# EAGLE board pcb-2d (EAGLE 9.7.0)
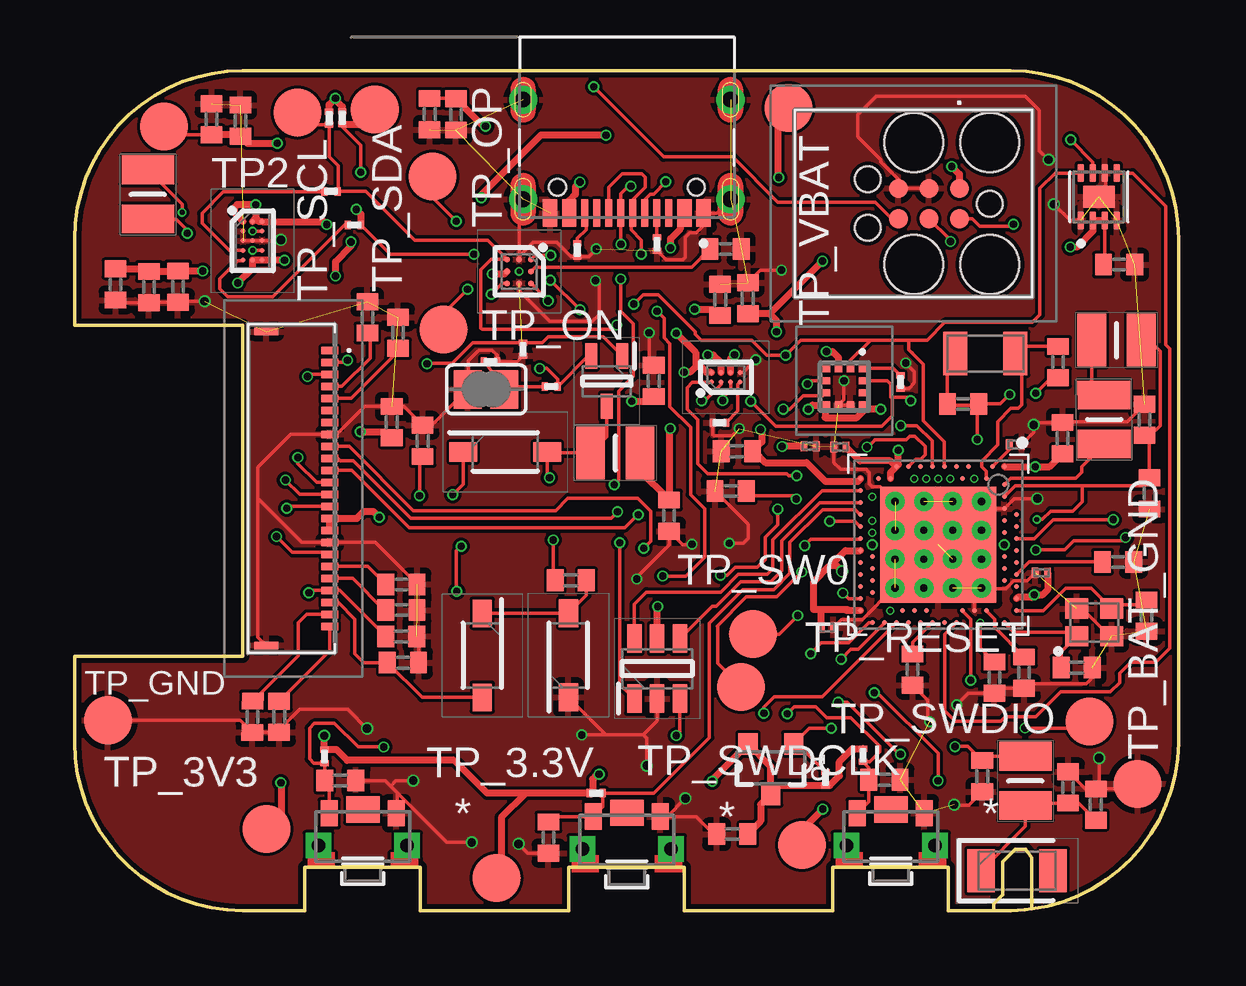
[diagram p0: board, top side]
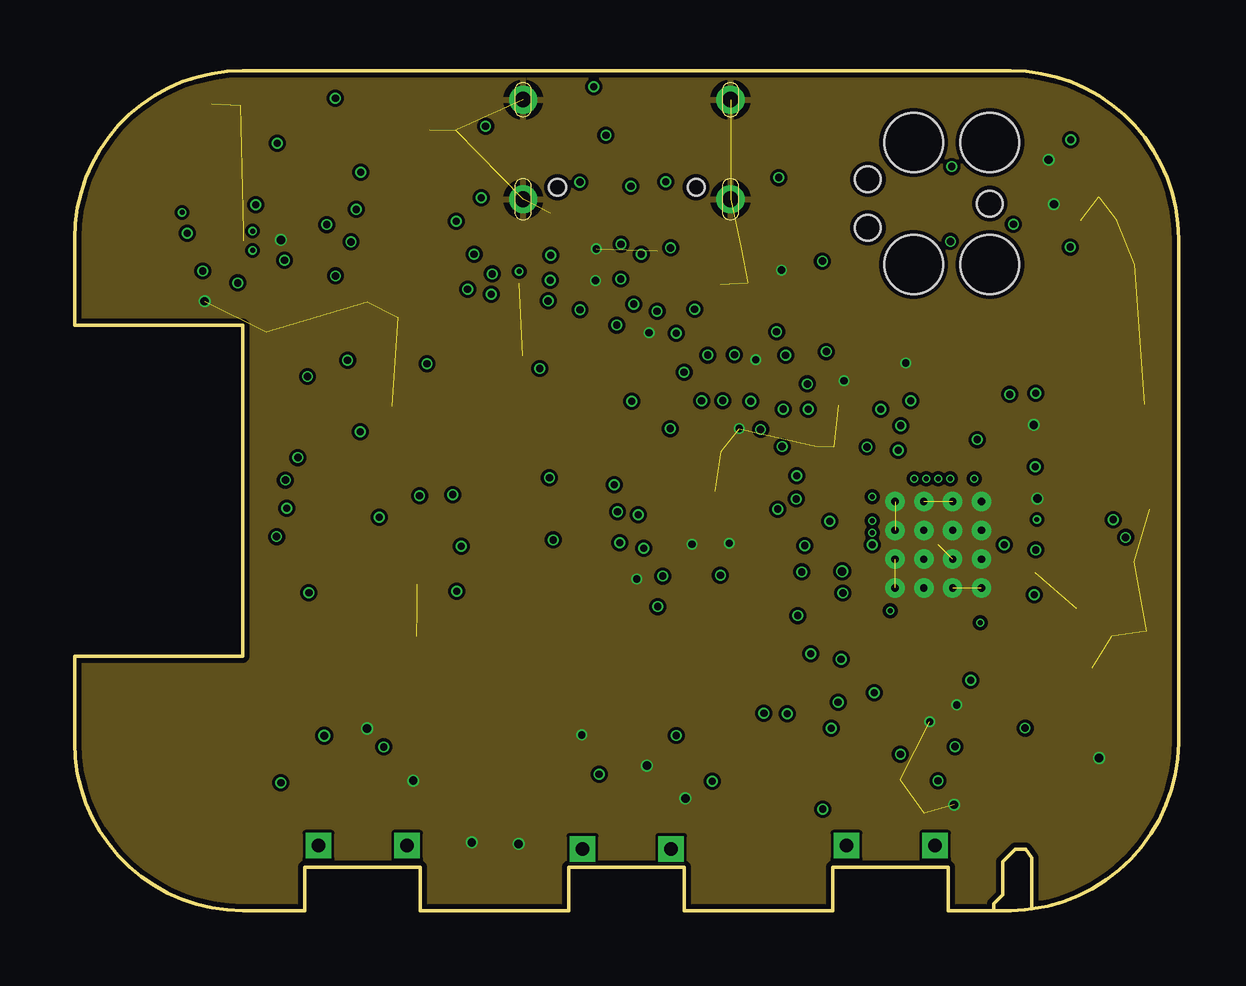
[diagram p1: board, inner layer Route2]
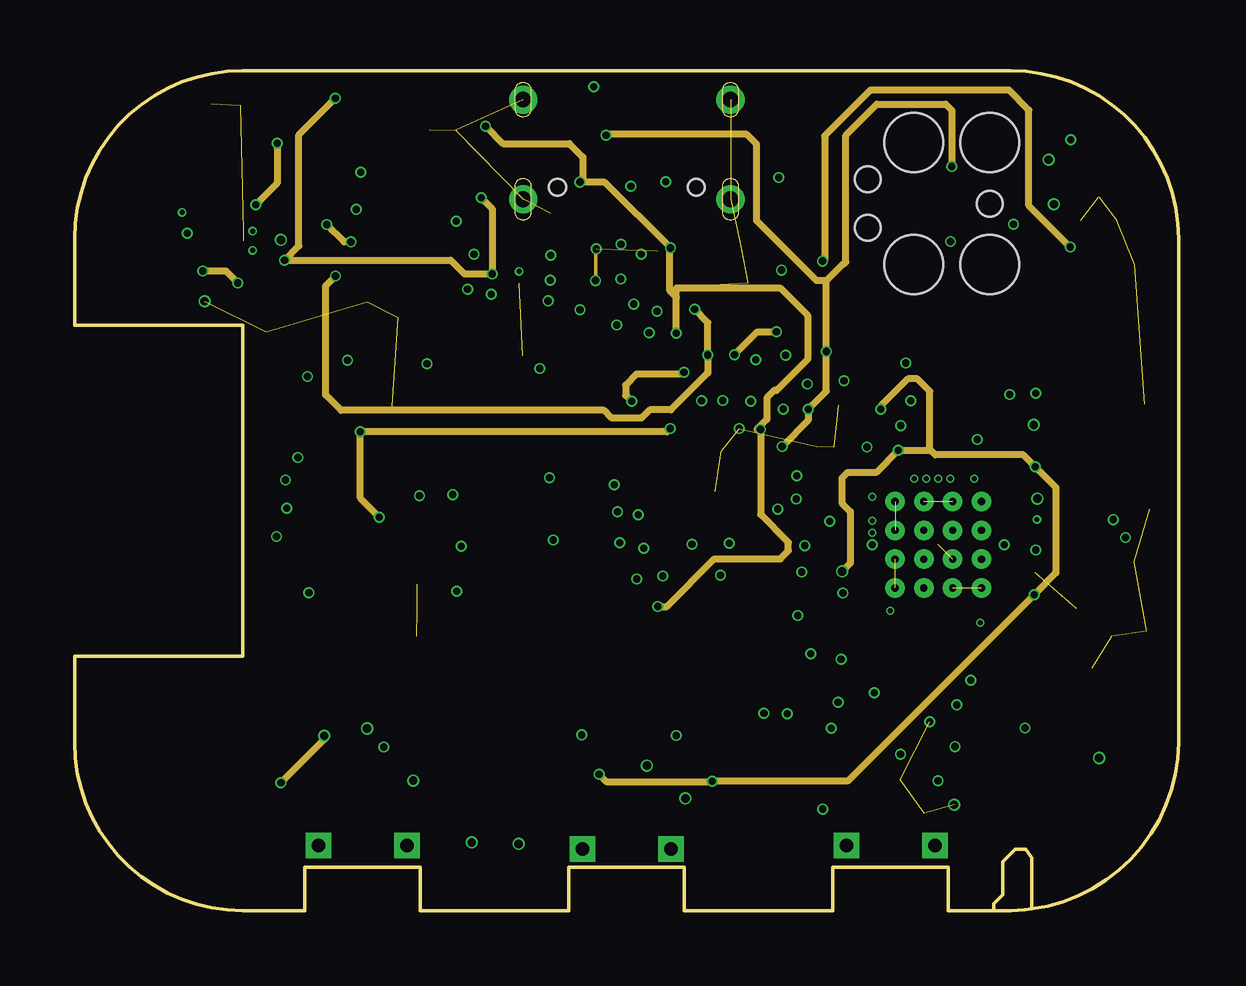
[diagram p2: board, inner layer Route15]
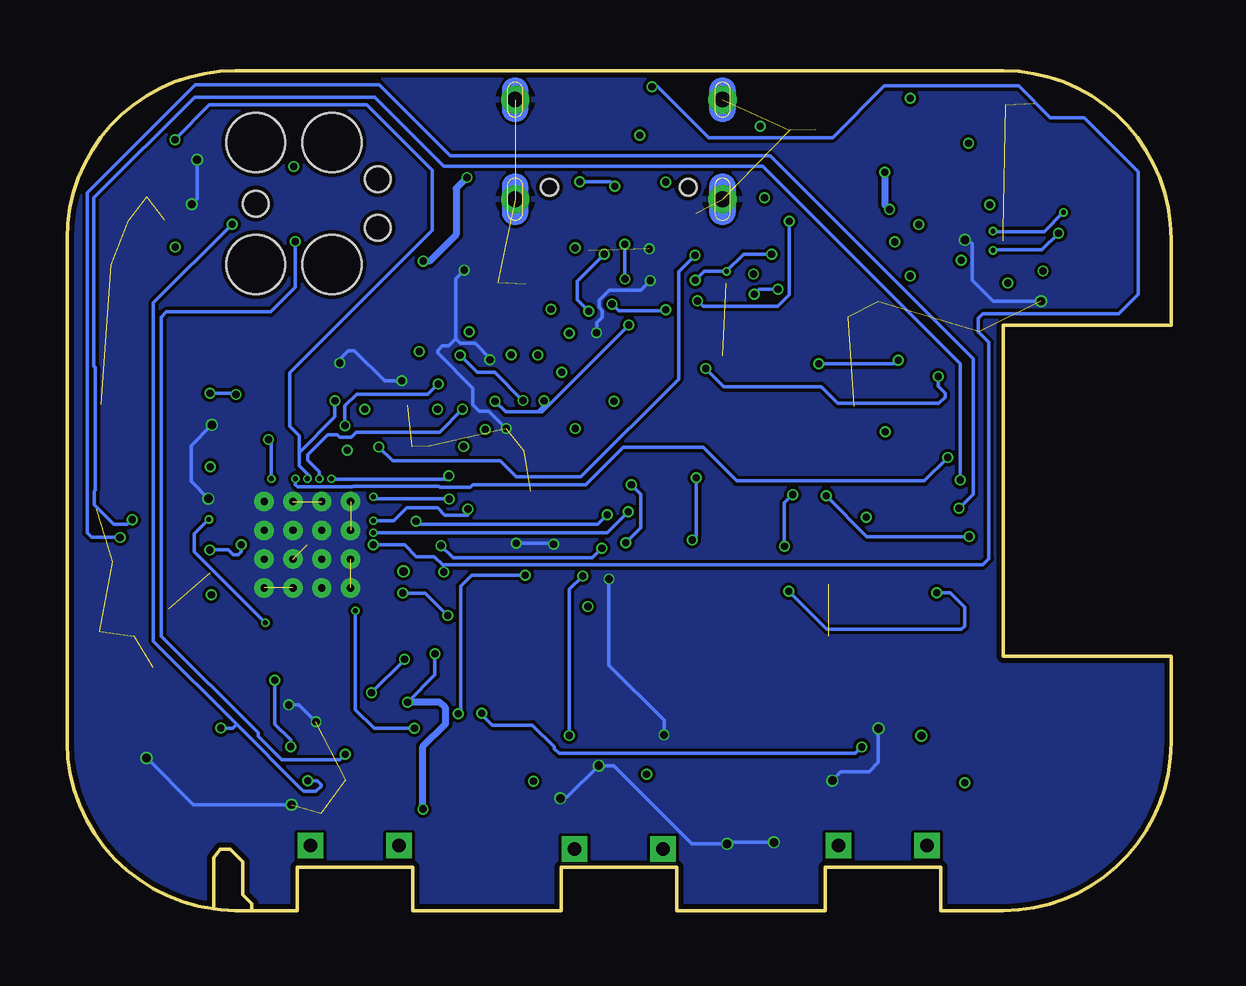
[diagram p3: board, bottom side, seen from below]

Size 46 x 35 mm. Coordinates in mm from the lower left corner, seen from the top.
Outline: 38.3,0 39,0 arc8 39.88,0.07
Outline: 38.3,0 36.4,0 36.4,1.8 31.6,1.8 31.6,0 25.4,0 25.4,1.8 20.6,1.8 20.6,0 14.4,0 14.4,1.8 9.6,1.8 9.6,0 7,0 arc-90 0,7 0,10.6 7,10.6 7,24.4 0,24.4 0,28 arc-90 7,35 39,35 arc-90 46,28 46,7 arc-82 39.88,0.07
Outline: 38.3,0 38.3,0.29 38.67,0.67 38.67,2.04 39.2,2.56 39.63,2.56 39.88,2.2 39.88,0.07
Copper layers (1+2*15+16): Top 0.035mm / dielectric 1.6mm / Route2 0.035mm / dielectric 0.15mm / Route15 0.035mm / dielectric 0.2mm / Bottom 0.035mm
Design rules "jlcpcb-2layers.dru *": minimum track width 5mil, minimum drill 0.3mm, track to track 5mil, track to pad 5mil, pad to pad 5mil, via to via 5mil, smd to smd 5mil, copper to edge 0.2mm, drill to drill 6mil, minimum pad ring 10mil, minimum via ring 3mil, stop-mask expansion 4mil, vias tented up to drill 0mil, thermal gap 10mil

## Footprints (pad centres in the part's own frame; a part is rotated, then mirrored left to right if it is on the bottom)
2450AT18B100E_ANTC3216X140N = smd 1.15 x 1.8: 1 -1.5,0; 2 1.5,0
ESP32_C6_LIBRARY_1_ESP32_WROVER_EAGLE-LTSPICE_C0402 = smd 0.7 x 0.9: 1 -0.65,0; 2 0.65,0
NORDIC_NRF_3_RESC0201_L = smd 0.28 x 0.43: 1 -0.255,0; 2 0.255,0
ESP32_C6_LIBRARY_3_SOT95P280X145-6N = smd 1.2 x 0.6: 1 -1.25,0.95; 2 -1.25,0; 3 -1.25,-0.95; 4 1.25,-0.95; 5 1.25,0; 6 1.25,0.95
ESP32_C6_LIBRARY_5_SOD3716X135N = smd 1.15 x 0.8: 1 -1.75,0; 2 1.75,0
BQ25180YBGR_BGA8C40P2X4_100X155X50 = smd 0.2 x 0.2: A1 -0.2,0.6; A2 0.2,0.6; B1 -0.2,0.2; B2 0.2,0.2; C1 -0.2,-0.2; C2 0.2,-0.2; D1 -0.2,-0.6; D2 0.2,-0.6
RT6160AWSC_BGA15C40P3X5_140X230X60 = smd 0.216 x 0.216: A1 -0.4,0.8; A2 0,0.8; A3 0.4,0.8; B1 -0.4,0.4; B2 0,0.4; B3 0.4,0.4; C1 -0.4,0; C2 0,0; C3 0.4,0; D1 -0.4,-0.4; D2 0,-0.4; D3 0.4,-0.4; E1 -0.4,-0.8; E2 0,-0.8; E3 0.4,-0.8
BMA423_BMA423 = smd 0.3 x 0.35: 1 -0.75,-0.775; 2 -0.25,-0.775; 3 0.25,-0.775; 4 0.75,-0.775; 7 0.75,0.775; 8 0.25,0.775; 9 -0.25,0.775; 10 -0.75,0.775 | smd 0.35 x 0.3: 5 0.775,-0.25; 6 0.775,0.25; 11 -0.775,0.25; 12 -0.775,-0.25
DRV2605YZFR_BGA9C50P3X3_144X144X62 = smd 0.25 x 0.25: A1 -0.5,0.5; A2 0,0.5; A3 0.5,0.5; B1 -0.5,0; B2 0,0; B3 0.5,0; C1 -0.5,-0.5; C2 0,-0.5; C3 0.5,-0.5
TC2030-IDC_TC2030IDC = smd 0.783 x 0.783: 1 -0.953,-0.635; 2 -0.953,0.635; 3 0.317,-0.635; 4 0.317,0.635; 5 1.588,-0.635; 6 1.588,0.635 | hole 2.451: -2.223,-2.54; -2.223,2.54; 0.952,-2.54; 0.952,2.54 | hole 1.067: -2.223,0; 2.857,-1.016; 2.857,1.016
503480-2400_5034802400 = smd 0.3 x 0.7: 1 -5.75,1.525; 2 -5.25,1.525; 3 -4.75,1.525; 4 -4.25,1.525; 5 -3.75,1.525; 6 -3.25,1.525; 7 -2.75,1.525; 8 -2.25,1.525; 9 -1.75,1.525; 10 -1.25,1.525; 11 -0.75,1.525; 12 -0.25,1.525; 13 0.25,1.525; 14 0.75,1.525; 15 1.25,1.525; 16 1.75,1.525; 17 2.25,1.525; 18 2.75,1.525; 19 3.25,1.525; 20 3.75,1.525; 21 4.25,1.525; 22 4.75,1.525; 23 5.25,1.525; 24 5.75,1.525 | smd 0.3 x 1: MP1 -6.54,-1.125; MP2 6.54,-1.125
KH-TYPE-C-16P_KINGHELM_KH-TYPE-C-16P = smd 0.6 x 1.15: A1_B12 -3.2,4.725; A4_B9 -2.4,4.725; A9_B4 2.4,4.725; A12_B1 3.2,4.725 | smd 0.3 x 1.15: A5 -1.25,4.725; A6 -0.25,4.725; A7 0.25,4.725; A8 1.25,4.725; B5 1.75,4.725; B6 0.75,4.725; B7 -0.75,4.725; B8 -1.75,4.725 | drill 0.65 pad 1.05: SH1 -4.32,0; SH2 4.32,0; SH3 -4.32,4.15; SH4 4.32,4.15 | hole 0.7: -2.89,3.65; 2.89,3.65
MLP2016SR47MT0S1_INDC2016X100N = smd 1.2 x 2.2: 1 -1.028,0; 2 1.028,0
ESP32_C6_LIBRARY_4_ESP32_C6_LIBRARY_4_ESP32_C6_LIBRARY_4_ESP32_C6_LIBRARY_4_ESP32_WROVER_SPARKFUN-DISCRETESEMI_SOT23-3 = smd 0.8 x 0.9: 1 -0.95,-1; 2 0.95,-1; 3 0,1.1
ESP32_C6_LIBRARY_6_SOT65P210X110-3N = smd 1.05 x 0.5: 1 -1.05,0.65; 2 -1.05,-0.65; 3 1.05,0
ERA-1AEB3401C_0201 = smd 0.35 x 0.25: 1 0,0.275; 2 0,-0.275
CPF0201D7K68C1_0201 = smd 0.35 x 0.25: 1 0,0.275; 2 0,-0.275
ESP32_C6_LIBRARY_7_JUMPER_SJ = smd 1.168 x 1.6: 1 -0.762,0; 2 0.762,0
2025-10-22_07-23-44_LIBRARY_SW_EVP-AKE31A_PAN = smd 0.711 x 1.092: 1 -1.4,-0.972; 2 1.4,-0.972 | drill 0.559 pad 0.914 square: 3 -1.848,0.381; 4 1.848,0.381 | smd 1.397 x 1.092: 5 0,-1.124
HECTOR_WATCH_1_TP20R = smd 2 x 2: TP 0,0
ESP32_C6_LIBRARY_SON50P200X200X80-9N = smd 0.76 x 0.27: 1 -0.985,0.75; 2 -0.985,0.25; 3 -0.985,-0.25; 4 -0.985,-0.75; 5 0.985,-0.75; 6 0.985,-0.25; 7 0.985,0.25; 8 0.985,0.75 | smd 0.9 x 1.3: 9 0,0
NORDIC_NRF_4_AQFN50P700X700X85_HS-74N = smd 4.85 x 4.85: P$74 0,0 | drill 0.3 pad 0.6: P$75 -1.8,1.8; P$76 -0.6,1.8; P$77 0.6,1.8; P$78 1.8,1.8; P$79 -1.8,0.6; P$80 -0.6,0.6; P$81 0.6,0.6; P$82 1.8,0.6; P$83 -1.8,-0.6; P$84 -0.6,-0.6; P$85 0.6,-0.6; P$86 1.8,-0.6; P$87 -1.8,-1.8; P$88 -0.6,-1.8; P$89 0.6,-1.8; P$90 1.8,-1.8 | smd 0.2 x 0.2: P$A8 -1.25,3.25; P$A10 -0.75,3.25; P$A12 -0.25,3.25; P$A14 0.25,3.25; P$A16 0.75,3.25; P$A18 1.25,3.25; P$A20 1.75,3.25; P$A22 2.25,3.25; P$A23 2.75,3.25; P$AA24 3.25,-2.25; P$AB2 -2.75,-2.5; P$AC5 -2,-2.75; P$AC9 -1,-2.75; P$AC11 -0.5,-2.75; P$AC13 0,-2.75; P$AC15 0.5,-2.75; P$AC17 1,-2.75; P$AC19 1.5,-2.75; P$AC21 2,-2.75; P$AC24 3.25,-2.75; P$AD2 -2.75,-3.25; P$AD4 -2.25,-3.25; P$AD6 -1.75,-3.25; P$AD8 -1.25,-3.25; P$AD10 -0.75,-3.25; P$AD12 -0.25,-3.25; P$AD14 0.25,-3.25; P$AD16 0.75,-3.25; P$AD18 1.25,-3.25; P$AD20 1.75,-3.25; P$AD22 2.25,-3.25; P$AD23 2.75,-3.25; P$B1 -3.25,2.75; P$B3 -2.5,2.75; P$B5 -2,2.75; P$B7 -1.5,2.75; P$B9 -1,2.75; P$B11 -0.5,2.75; P$B13 0,2.75; P$B15 0.5,2.75; P$B17 1,2.75; P$B19 1.5,2.75; P$B24 3.25,2.75; P$C1 -3.25,2.25; P$D2 -2.75,2; P$D23 2.75,2; P$E24 3.25,1.75; P$F2 -2.75,1.5; P$F23 2.75,1.5; P$G1 -3.25,1.25; P$H2 -2.75,1; P$H23 2.75,1; P$J1 -3.25,0.75; P$J24 3.25,0.75; P$K2 -2.75,0.5; P$L1 -3.25,0.25; P$L24 3.25,0.25; P$M2 -2.75,0; P$N1 -3.25,-0.25; P$N24 3.25,-0.25; P$P2 -2.75,-0.5; P$P23 2.75,-0.5; P$R1 -3.25,-0.75; P$R24 3.25,-0.75; P$T2 -2.75,-1; P$T23 2.75,-1; P$U1 -3.25,-1.25; P$U24 3.25,-1.25; P$V23 2.75,-1.5; P$W1 -3.25,-1.75; P$W24 3.25,-1.75; P$Y2 -2.75,-2; P$Y23 2.75,-2
NORDIC_NRF_BT-XTAL_2016_N = smd 0.95 x 0.85: 1 -0.725,-0.575; 2 0.725,-0.575; 3 0.725,0.575; 4 -0.725,0.575
NORDIC_NRF_1_XTAL_3215_N = smd 1 x 1.8: 1 -1.25,0; 2 1.25,0

## Placement (x,y rotation side)
ANT1  2450AT18B100E_2450AT18B100E  [2450AT18B100E_ANTC3216X140N]  39.27,1.66 0 top
C1  12pF  [ESP32_C6_LIBRARY_1_ESP32_WROVER_EAGLE-LTSPICE_C0402]  41.76,10.13 0 top
C1-EP-DR  10uF  [ESP32_C6_LIBRARY_1_ESP32_WROVER_EAGLE-LTSPICE_C0402]  24.77,16.46 270 top
C2  12pF  [ESP32_C6_LIBRARY_1_ESP32_WROVER_EAGLE-LTSPICE_C0402]  44.66,12.29 270 top
C2-EP-DR  4.7uF/25V  [ESP32_C6_LIBRARY_1_ESP32_WROVER_EAGLE-LTSPICE_C0402]  20.67,13.77 180 top
C3  1pF  [ESP32_C6_LIBRARY_1_ESP32_WROVER_EAGLE-LTSPICE_C0402]  37.82,5.6 270 top
C4  1pF  [ESP32_C6_LIBRARY_1_ESP32_WROVER_EAGLE-LTSPICE_C0402]  41.4,5.13 90 top
C5  100nF  [NORDIC_NRF_3_RESC0201_L]  39.2,19.42 0 top
C6  4.7uF  [ESP32_C6_LIBRARY_1_ESP32_WROVER_EAGLE-LTSPICE_C0402]  27.4,3.19 180 top
C7  100nF  [NORDIC_NRF_3_RESC0201_L]  31.89,19.32 180 top
C8  100nF  [NORDIC_NRF_3_RESC0201_L]  31.36,11.79 0 top
C9  820pF  [ESP32_C6_LIBRARY_1_ESP32_WROVER_EAGLE-LTSPICE_C0402]  34.92,10.05 270 top
C10  N.C.  [ESP32_C6_LIBRARY_1_ESP32_WROVER_EAGLE-LTSPICE_C0402]  38.33,9.71 270 top
C11  100pF  [ESP32_C6_LIBRARY_1_ESP32_WROVER_EAGLE-LTSPICE_C0402]  39.56,9.92 270 top
C12  100nF  [NORDIC_NRF_3_RESC0201_L]  40.29,14.08 180 top
C13  N.C.  [ESP32_C6_LIBRARY_1_ESP32_WROVER_EAGLE-LTSPICE_C0402]  43.48,14.53 0 top
C14  4.7uF  [ESP32_C6_LIBRARY_1_ESP32_WROVER_EAGLE-LTSPICE_C0402]  41.17,19.69 90 top
C15  1uF  [ESP32_C6_LIBRARY_1_ESP32_WROVER_EAGLE-LTSPICE_C0402]  44.79,17.38 270 top
C16  47nF  [ESP32_C6_LIBRARY_1_ESP32_WROVER_EAGLE-LTSPICE_C0402]  44.58,20.45 90 top
C17  12pF  [ESP32_C6_LIBRARY_1_ESP32_WROVER_EAGLE-LTSPICE_C0402]  40.98,22.86 90 top
C18  12pF  [ESP32_C6_LIBRARY_1_ESP32_WROVER_EAGLE-LTSPICE_C0402]  37.02,21.11 0 top
C19  100nF  [NORDIC_NRF_3_RESC0201_L]  30.64,19.35 0 top
C20  4.7uF  [ESP32_C6_LIBRARY_1_ESP32_WROVER_EAGLE-LTSPICE_C0402]  27.34,17.48 180 top
C21  4.7uF  [ESP32_C6_LIBRARY_1_ESP32_WROVER_EAGLE-LTSPICE_C0402]  27.59,19.14 180 top
C22  N.C.  [ESP32_C6_LIBRARY_1_ESP32_WROVER_EAGLE-LTSPICE_C0402]  42.55,4.42 90 top
C23  0.1uF  [ESP32_C6_LIBRARY_1_ESP32_WROVER_EAGLE-LTSPICE_C0402]  5.7,32.98 270 top
C24  10uF  [ESP32_C6_LIBRARY_1_ESP32_WROVER_EAGLE-LTSPICE_C0402]  6.91,32.92 270 top
C25  22uF  [ESP32_C6_LIBRARY_1_ESP32_WROVER_EAGLE-LTSPICE_C0402]  3.1,25.98 270 top
C27  0.1uF  [ESP32_C6_LIBRARY_1_ESP32_WROVER_EAGLE-LTSPICE_C0402]  43.52,26.92 0 top
C29  1uF  [ESP32_C6_LIBRARY_1_ESP32_WROVER_EAGLE-LTSPICE_C0402]  11.07,5.42 0 top
C30  1uF  [ESP32_C6_LIBRARY_1_ESP32_WROVER_EAGLE-LTSPICE_C0402]  19.75,3.05 270 top
C31  1uF  [ESP32_C6_LIBRARY_1_ESP32_WROVER_EAGLE-LTSPICE_C0402]  33.74,5.45 0 top
C32  1uF  [ESP32_C6_LIBRARY_1_ESP32_WROVER_EAGLE-LTSPICE_C0402]  27.12,27.57 0 top
C33  22uF  [ESP32_C6_LIBRARY_1_ESP32_WROVER_EAGLE-LTSPICE_C0402]  4.31,26 270 top
C34  0.1uF  [ESP32_C6_LIBRARY_1_ESP32_WROVER_EAGLE-LTSPICE_C0402]  1.7,26.09 270 top
C37  1uF  [ESP32_C6_LIBRARY_1_ESP32_WROVER_EAGLE-LTSPICE_C0402]  28.05,25.52 90 top
C38  1uF  [ESP32_C6_LIBRARY_1_ESP32_WROVER_EAGLE-LTSPICE_C0402]  24.13,22.07 90 top
C39  10uF  [ESP32_C6_LIBRARY_1_ESP32_WROVER_EAGLE-LTSPICE_C0402]  26.9,25.45 90 top
C42  0.1uF  [ESP32_C6_LIBRARY_1_ESP32_WROVER_EAGLE-LTSPICE_C0402]  15.89,33.18 270 top
C43  4.7uF  [ESP32_C6_LIBRARY_1_ESP32_WROVER_EAGLE-LTSPICE_C0402]  14.8,33.19 270 top
D1  ESP32_C6_LIBRARY_3_USBLC6-2SC6Y  [ESP32_C6_LIBRARY_3_SOT95P280X145-6N]  24.27,10.09 90 top
D2  MBR0503  [ESP32_C6_LIBRARY_5_SOD3716X135N]  16.98,10.64 270 top
D4  MBR0503  [ESP32_C6_LIBRARY_5_SOD3716X135N]  20.58,10.64 90 top
D5  MBR0503  [ESP32_C6_LIBRARY_5_SOD3716X135N]  17.94,19.11 0 top
EPD_C1  iuF/50V  [ESP32_C6_LIBRARY_1_ESP32_WROVER_EAGLE-LTSPICE_C0402]  13.47,24.08 270 top
EPD_C2  1uF/50V  [ESP32_C6_LIBRARY_1_ESP32_WROVER_EAGLE-LTSPICE_C0402]  12.2,24.72 270 top
EPD_C5  0.1uF/50V  [ESP32_C6_LIBRARY_1_ESP32_WROVER_EAGLE-LTSPICE_C0402]  13.21,20.36 270 top
EPD_C6  1uF/50V  [ESP32_C6_LIBRARY_1_ESP32_WROVER_EAGLE-LTSPICE_C0402]  14.5,19.57 270 top
EPD_C7  1uF/50V  [ESP32_C6_LIBRARY_1_ESP32_WROVER_EAGLE-LTSPICE_C0402]  13.62,13.59 180 top
EPD_C8  1uF/50V  [ESP32_C6_LIBRARY_1_ESP32_WROVER_EAGLE-LTSPICE_C0402]  13.62,12.52 180 top
EPD_C9  1uF/50V  [ESP32_C6_LIBRARY_1_ESP32_WROVER_EAGLE-LTSPICE_C0402]  13.61,11.43 180 top
EPD_C10  1uF/50V  [ESP32_C6_LIBRARY_1_ESP32_WROVER_EAGLE-LTSPICE_C0402]  13.68,10.33 180 top
EPD_C11  1uF/50V  [ESP32_C6_LIBRARY_1_ESP32_WROVER_EAGLE-LTSPICE_C0402]  7.41,8.08 89.3 top
EPD_C12  1uF/50V  [ESP32_C6_LIBRARY_1_ESP32_WROVER_EAGLE-LTSPICE_C0402]  8.52,8.08 90 top
IC1  BQ25180YBGR_BQ25180YBGR  [BQ25180YBGR_BGA8C40P2X4_100X155X50]  27.14,22.22 90 top
IC2  RT6160AWSC_RT6160AWSC  [RT6160AWSC_BGA15C40P3X5_140X230X60]  7.42,27.91 0 top
IC3  BMA423_BMA423  [BMA423_BMA423]  32.08,21.83 180 top
IC4  DRV2605YZFR_DRV2605YZFR  [DRV2605YZFR_BGA9C50P3X3_144X144X62]  18.53,26.64 270 top
J1  TC2030-IDC_TC2030-IDC  [TC2030-IDC_TC2030IDC]  35.91,29.46 180 top
J2  503480-2400_503480-2400  [503480-2400_5034802400]  9.11,17.59 270 top
J3  KH-TYPE-C-16P_KH-TYPE-C-16P  [KH-TYPE-C-16P_KINGHELM_KH-TYPE-C-16P]  23.01,33.79 180 top
L1  3.9nH  [MLP2016SR47MT0S1_INDC2016X100N]  39.62,5.41 270 top
L2  10uH  [MLP2016SR47MT0S1_INDC2016X100N]  42.9,20.46 90.4 top
L3  10nH  [MLP2016SR47MT0S1_INDC2016X100N]  43.41,23.77 0 top
L5  68uH  [MLP2016SR47MT0S1_INDC2016X100N]  22.53,19.07 180 top
L7  MLP2016SR47MT0S1_FTC252012SR47MBCA  [MLP2016SR47MT0S1_INDC2016X100N]  3.05,29.84 270 top
Q1  20V/4.2A/52mΩ/1.4W  [ESP32_C6_LIBRARY_4_ESP32_C6_LIBRARY_4_ESP32_C6_LIBRARY_4_ESP32_C6_LIBRARY_4_ESP32_WROVER_SPARKFUN-DISCRETESEMI_SOT23-3]  29.01,5.95 180 top
Q3  ESP32_C6_LIBRARY_6_SI1308EDL-T1-GE3  [ESP32_C6_LIBRARY_6_SOT65P210X110-3N]  22.17,22.06 270 top
R1  10k  [ERA-1AEB3401C_0201]  21.73,4.89 270 top
R1_EP_DR  0.47  [ERA-1AEB3401C_0201]  19.86,21.83 90 top
R1_USB  5k1  [ERA-1AEB3401C_0201]  24.27,27.77 180 top
R2  0  [ERA-1AEB3401C_0201]  11.66,28.58 90 top
R2_EP_DR  10K  [ERA-1AEB3401C_0201]  18.68,23.39 180 top
R2_USB  5k1  [ERA-1AEB3401C_0201]  20.94,27.52 0 top
R3  0  [ERA-1AEB3401C_0201]  34.41,22.03 0 top
R4  0  [ERA-1AEB3401C_0201]  10.68,29.97 90 top
R5  10k  [ERA-1AEB3401C_0201]  32.85,6.48 180 top
R6  10k  [ERA-1AEB3401C_0201]  10.42,6.42 180 top
R9  10k  [CPF0201D7K68C1_0201]  26.87,20.33 90 top
R17  3k3  [ERA-1AEB3401C_0201]  10.61,33.02 0 top
R18  3k3  [ERA-1AEB3401C_0201]  11.15,33.03 0 top
R_PWR_EPD  10k  [ERA-1AEB3401C_0201]  31.29,5.49 0 top
R_TYPE_SEL  2.2  [ERA-1AEB3401C_0201]  17.33,22.88 270 top
SJ1  SJ  [ESP32_C6_LIBRARY_7_JUMPER_SJ]  17.15,21.72 0 top
SW1  2025-10-22_07-23-44_LIBRARY_EVP-AKE31ASW_EVP-AKE31A_PAN  [2025-10-22_07-23-44_LIBRARY_SW_EVP-AKE31A_PAN]  23.01,2.95 180 top
SW2  2025-10-22_07-23-44_LIBRARY_EVP-AKE31ASW_EVP-AKE31A_PAN  [2025-10-22_07-23-44_LIBRARY_SW_EVP-AKE31A_PAN]  34.01,3.09 180 top
SW3  2025-10-22_07-23-44_LIBRARY_EVP-AKE31ASW_EVP-AKE31A_PAN  [2025-10-22_07-23-44_LIBRARY_SW_EVP-AKE31A_PAN]  12.01,3.09 180 top
TP2  HECTOR_WATCH_1_TPTP20R  [HECTOR_WATCH_1_TP20R]  3.72,32.68 0 top
TP_3.3V  HECTOR_WATCH_1_TPTP20R  [HECTOR_WATCH_1_TP20R]  17.59,1.36 0 top
TP_3V3  HECTOR_WATCH_1_TPTP20R  [HECTOR_WATCH_1_TP20R]  8,3.41 0 top
TP_BAT_GND  HECTOR_WATCH_1_TPTP20R  [HECTOR_WATCH_1_TP20R]  44.3,5.28 0 top
TP_GND  HECTOR_WATCH_1_TPTP20R  [HECTOR_WATCH_1_TP20R]  1.39,7.93 0 top
TP_ON  HECTOR_WATCH_1_TPTP20R  [HECTOR_WATCH_1_TP20R]  15.38,24.22 0 top
TP_OP  HECTOR_WATCH_1_TPTP20R  [HECTOR_WATCH_1_TP20R]  14.92,30.6 0 top
TP_RESET  HECTOR_WATCH_1_TPTP20R  [HECTOR_WATCH_1_TP20R]  27.77,9.32 0 top
TP_SCL  HECTOR_WATCH_1_TPTP20R  [HECTOR_WATCH_1_TP20R]  9.29,33.25 90 top
TP_SDA  HECTOR_WATCH_1_TPTP20R  [HECTOR_WATCH_1_TP20R]  12.51,33.39 270 top
TP_SW0  HECTOR_WATCH_1_TPTP20R  [HECTOR_WATCH_1_TP20R]  28.26,11.53 0 top
TP_SWDCLK  HECTOR_WATCH_1_TPTP20R  [HECTOR_WATCH_1_TP20R]  30.32,2.74 0 top
TP_SWDIO  HECTOR_WATCH_1_TPTP20R  [HECTOR_WATCH_1_TP20R]  42.29,7.88 0 top
TP_VBAT  HECTOR_WATCH_1_TPTP20R  [HECTOR_WATCH_1_TP20R]  29.76,33.44 180 top
U1  ESP32_C6_LIBRARY_MAX17048G+T10  [ESP32_C6_LIBRARY_SON50P200X200X80-9N]  42.68,29.75 90 top
U$1  NORDIC_NRF_4_NRF52840_QF  [NORDIC_NRF_4_AQFN50P700X700X85_HS-74N]  35.99,15.25 270 top
X1  32MHz  [NORDIC_NRF_BT-XTAL_2016_N]  42.48,12.01 0 top
X2  32.768kHz  [NORDIC_NRF_1_XTAL_3215_N]  37.95,23.21 0 top

## Library data of the parts
ANT1 = InkTime_v5; ARROW_PART_NUMBER: 2450AT18B100E; ARROW_PRICE-STOCK: https://www.arrow.com/en/products/2450at18b100e/johanson-dielectrics?utm_currency=USD&region=nac; DESCRIPTION: Antennas 2.45GHz ANTENNA; HEIGHT: 1.4mm; MANUFACTURER_NAME: JOHANSON TECHNOLOGY; MANUFACTURER_PART_NUMBER: 2450AT18B100E; MOUSER_PART_NUMBER: 609-2450AT18B100E; MOUSER_PRICE-STOCK: https://www.mouser.co.uk/ProductDetail/Johanson-Technology/2450AT18B100E?qs=yCnrNFeXz%252Bh5MFsFIXGZGA%3D%3D
C1 C1-EP-DR C2 C2-EP-DR C3 C4 C6 C9-C11 C13-C18 C20-C25 C27 C29-C34 C37-C39 C42 C43 EPD_C1 EPD_C2 EPD_C5-EPD_C12 = InkTime_v5; SPICEMODEL: NONE; SPICEPREFIX: C
C5 C7 C8 C12 C19 R1 R1_EP_DR R1_USB R2 R2_EP_DR R2_USB R3-R6 R9 R17 R18 R_PWR_EPD R_TYPE_SEL SJ1 TP2 TP_3.3V TP_3V3 TP_BAT_GND TP_GND TP_ON TP_OP TP_RESET TP_SCL TP_SDA TP_SW0 TP_SWDCLK TP_SWDIO TP_VBAT U$1 X1 X2 = InkTime_v5
D1 = InkTime_v5; AVAILABILITY: In Stock; CHECK_PRICES: https://www.snapeda.com/parts/USBLC6-2SC6Y/STMicroelectronics/view-part/?ref=eda; DESCRIPTION: 17V Clamp 5A (8/20µs) Ipp Tvs Diode Surface Mount SOT-23-6; MF: STMicroelectronics; MP: USBLC6-2SC6Y; PACKAGE: SOT-23-6 STMicroelectronics; PRICE: None; SNAPEDA_LINK: https://www.snapeda.com/parts/USBLC6-2SC6Y/STMicroelectronics/view-part/?ref=snap
D2 D4 D5 = InkTime_v5; AVAILABILITY: In Stock; CHECK_PRICES: https://www.snapeda.com/parts/MBR0530/Onsemi/view-part/?ref=eda; DESCRIPTION: Diode Schottky 30 V 500mA Surface Mount SOD-123; MF: ON Semiconductor; MP: MBR0530; PACKAGE: SOD-123-2 ON Semiconductor; PRICE: None; PURCHASE-URL: https://www.snapeda.com/api/url_track_click_mouser/?unipart_id=179458&manufacturer=ON Semiconductor&part_name=MBR0530&search_term=None; SNAPEDA_LINK: https://www.snapeda.com/parts/MBR0530/Onsemi/view-part/?ref=snap
IC1 = InkTime_v5; ARROW_PART_NUMBER: BQ25180YBGR; ARROW_PRICE-STOCK: https://www.arrow.com/en/products/bq25180ybgr/texas-instruments?utm_currency=USD&region=nac; DESCRIPTION: Charger IC Lithium Ion/Polymer, Lithium Iron Phosphate 8-DSBGA (1.6x1.1); HEIGHT: 0.5mm; MANUFACTURER_NAME: Texas Instruments; MANUFACTURER_PART_NUMBER: BQ25180YBGR; MOUSER_PART_NUMBER: 595-BQ25180YBGR; MOUSER_PRICE-STOCK: https://www.mouser.co.uk/ProductDetail/Texas-Instruments/BQ25180YBGR?qs=doiCPypUmgEWjAK%252BJAX6Tw%3D%3D
IC2 = InkTime_v5; DESCRIPTION: Buck-Boost Regulator Positive Output Step-Up/Step-Down I2C DC-DC Controller IC 15-WL-CSP (BSC) (1.4x2.3); HEIGHT: 0.6mm; MANUFACTURER_NAME: RICHTEK; MANUFACTURER_PART_NUMBER: RT6160AWSC; MOUSER_PART_NUMBER: 835-RT6160AWSC; MOUSER_PRICE-STOCK: https://www.mouser.co.uk/ProductDetail/Richtek/RT6160AWSC?qs=amGC7iS6iy%2FLd9PSoixZXQ%3D%3D
IC3 = InkTime_v5; ARROW_PART_NUMBER: BMA423; ARROW_PRICE-STOCK: https://www.arrow.com/en/products/bma423/bosch; DESCRIPTION: Accelerometers Triaxial low-g 12bit Acceleration Sensor; HEIGHT: 1mm; MANUFACTURER_NAME: BOSCH; MANUFACTURER_PART_NUMBER: BMA423; MOUSER_PART_NUMBER: 262-BMA423; MOUSER_PRICE-STOCK: https://www.mouser.co.uk/ProductDetail/Bosch-Sensortec/BMA423?qs=HXFqYaX1Q2xC%252BSgeGoX3mg%3D%3D
IC4 = InkTime_v5; ARROW_PART_NUMBER: DRV2605YZFR; ARROW_PRICE-STOCK: https://www.arrow.com/en/products/drv2605yzfr/texas-instruments?region=nac; DESCRIPTION: Haptic Driver for ERM/LRA with Built-In Library and Smart Loop Architecture; HEIGHT: 0.625mm; MANUFACTURER_NAME: Texas Instruments; MANUFACTURER_PART_NUMBER: DRV2605YZFR
J1 = InkTime_v5; DESCRIPTION: CABLE ADAPTER 6 POS; HEIGHT: 19mm; MANUFACTURER_NAME: Tag Connect; MANUFACTURER_PART_NUMBER: TC2030-IDC
J2 = InkTime_v5; DESCRIPTION: FFC & FPC Connectors 0.5mm FPC RA SMT Dual Contact 24Ckt; HEIGHT: 1.87mm; MANUFACTURER_NAME: Molex; MANUFACTURER_PART_NUMBER: 503480-2400; MOUSER_PART_NUMBER: 538-503480-2400; MOUSER_PRICE-STOCK: https://www.mouser.co.uk/ProductDetail/Molex/503480-2400?qs=OAhjpuo3Vu7efIoxFh9AOw%3D%3D
J3 = InkTime_v5; AVAILABILITY: Not in stock; CHECK_PRICES: https://www.snapeda.com/parts/KH-TYPE-C-16P/Kinghelm/view-part/?ref=eda; MF: kinghelm; MP: KH-TYPE-C-16P; PACKAGE: None; PRICE: None; SNAPEDA_LINK: https://www.snapeda.com/parts/KH-TYPE-C-16P/Kinghelm/view-part/?ref=snap
L1-L3 L5 L7 = InkTime_v5; DESCRIPTION: SMD / SMT Inductors (Coils), L=0.47?H, L x W x T :; HEIGHT: 1mm; JLCPCB: https://jlcpcb.com/partdetail/6763488-FTC252012SR47MBCA/C5832368; MANUFACTURER_NAME: TDK; MANUFACTURER_PART_NUMBER: FTC252012SR47MBCA
Q1 = InkTime_v5; PROD_ID: TRAN-14388
Q3 = InkTime_v5; AVAILABILITY: In Stock; CHECK_PRICES: https://www.snapeda.com/parts/SI1308EDL-T1-GE3/Vishay+Siliconix/view-part/?ref=eda; DESCRIPTION: Si1308EDL-T1-GE3 N-channel MOSFET Transistor, 1.5 A, 30 V, 3-Pin SC-70 | Siliconix / Vishay SI1308EDL-T1-GE3; MF: Vishay Siliconix; MP: SI1308EDL-T1-GE3; PACKAGE: SOT-323 Vishay Semiconductor; PRICE: None; PURCHASE-URL: https://www.snapeda.com/api/url_track_click_mouser/?unipart_id=274603&manufacturer=Vishay Siliconix&part_name=SI1308EDL-T1-GE3&search_term=None; SNAPEDA_LINK: https://www.snapeda.com/parts/SI1308EDL-T1-GE3/Vishay+Siliconix/view-part/?ref=snap
SW1-SW3 = InkTime_v5; COPYRIGHT: Copyright (C) 2025 Ultra Librarian. All rights reserved.; DIGI-KEY_PART_NUMBER_1: P123437TR-ND; DIGI-KEY_PART_NUMBER_2: P123437CT-ND; DIGI-KEY_PART_NUMBER_3: P123437DKR-ND; MANUFACTURER_NAME: Panasonic; MANUFACTURER_PART_NUMBER: EVP-AKE31A
U1 = InkTime_v5; AVAILABILITY: In Stock; CHECK_PRICES: https://www.snapeda.com/parts/MAX17048G+T10/Analog+Devices/view-part/?ref=eda; DESCRIPTION: 3µA 1-Cell/2-Cell Fuel Gauge with ModelGauge; MF: Analog Devices; MP: MAX17048G+T10; PACKAGE: TDFN-8 Maxim; PRICE: None; PURCHASE-URL: https://www.snapeda.com/api/url_track_click_mouser/?unipart_id=329239&manufacturer=Analog Devices&part_name=MAX17048G+T10&search_term=None; SNAPEDA_LINK: https://www.snapeda.com/parts/MAX17048G+T10/Analog+Devices/view-part/?ref=snap

## Nets
3V3: C6.1 C7.1 C8.1 C12.1 C14.1 C19.1 C25.1 C33.1 C34.1 IC2.E2 IC2.E3 IC3.3 IC3.7 IC3.10 IC4.C2 J1.1 Q1.2 Q1.3 R1.2 R5.2 R6.2 R17.1 R18.1 R_PWR_EPD.2 TP_3.3V.TP TP_3V3.TP U$1.P$A22 U$1.P$AD14 U$1.P$AD23 U$1.P$B1 U$1.P$W1 U$1.P$Y2
ALERT: U1.5 U$1.P$J24
D+: D1.4 U$1.P$AD6
D-: D1.6 U$1.P$AD4
DEC1: C5.1 U$1.P$C1
DEC3: C11.1 U$1.P$D23
DEC4_6: C10.1 C15.1 C16.1 L3.2 U$1.P$B5 U$1.P$E24
DN: D1.1 J3.A7 J3.B7
DP: D1.3 J3.A6 J3.B6
EPD_3V3: C1-EP-DR.1 EPD_C5.2 J2.15 J2.16 L5.1
EPD_BUSY: J2.9 U$1.P$AD12
EPD_CS: J2.12 U$1.P$K2
EPD_DC: J2.11 U$1.P$AD10
EPD_RST: J2.10 U$1.P$AC11
GDR: J2.2 Q3.1 R2_EP_DR.2
GND: C1-EP-DR.2 C1.2 C2.2 C3.2 C4.2 C5.2 C6.2 C7.2 C8.2 C9.2 C10.2 C11.2 C12.2 C13.2 C14.2 C15.2 C16.2 C19.2 C20.2 C21.2 C22.2 C23.1 C24.1 C25.2 C27.2 C29.2 C30.2 C31.2 C32.2 C33.2 C34.2 C37.2 C38.2 C39.2 C42.2 C43.2 D1.2 D4.1 EPD_C1.1 EPD_C2.1 EPD_C5.1 EPD_C6.1 EPD_C7.1 EPD_C8.1 EPD_C9.1 EPD_C10.1 EPD_C11.1 EPD_C12.1 IC1.D2 IC2.B1 IC2.C1 IC2.C2 IC2.C3 IC3.8 IC3.9 IC4.B1 IC4.B3 J1.3 J1.5 J2.8 J2.17 J2.MP1 J2.MP2 J3.A1_B12 J3.A12_B1 J3.SH1 J3.SH2 J3.SH3 J3.SH4 R1_USB.1 R2_EP_DR.1 R2_USB.2 R3.2 R9.1 R_TYPE_SEL.1 SJ1.1 SW1.1 SW2.1 SW3.1 TP_BAT_GND.TP TP_GND.TP U1.1 U1.4 U1.6 U1.9 U$1.P$74 U$1.P$75 U$1.P$76 U$1.P$77 U$1.P$78 U$1.P$79 U$1.P$80 U$1.P$81 U$1.P$82 U$1.P$83 U$1.P$84 U$1.P$85 U$1.P$86 U$1.P$87 U$1.P$88 U$1.P$89 U$1.P$90 U$1.P$B7 U$1.P$F23 X1.2 X1.4
HAPTIC_EN: IC4.A1 U$1.P$U1
IMU_INT1: IC3.5 U$1.P$N1
IMU_INT2: IC3.6 U$1.P$P2
LX1: IC2.B2 IC2.B3 L7.1
LX2: IC2.D2 IC2.D3 L7.2
MOSI: J2.14 U$1.P$B13
N$1: IC3.1 R3.1
N$2: IC2.D1 R4.1
N$3: IC1.D1 R9.2
N$5: IC2.E1 R2.1
N$6: C20.1 U$1.P$AC5
N$7: C9.1 U$1.P$N24
N$8: C3.1 L1.1 U$1.P$H23
N$9: C13.1 U$1.P$A18
N$10: C2-EP-DR.2 D5.2 L5.2 Q3.3
N$11: L2.1 U$1.P$B3
N$12: C2.1 U$1.P$A23 X1.3
N$13: C1.1 U$1.P$B24 X1.1
N$14: L2.2 L3.1
N$16: R1_EP_DR.1 R_TYPE_SEL.2 SJ1.2
N$17: C2-EP-DR.1 D2.1 D4.2
N$20: C32.1 IC4.A2
N$21: EPD_C2.2 J2.4
N$23: EPD_C1.2 J2.5
N$25: EPD_C6.2 J2.18
N$26: EPD_C7.2 J2.19
N$28: EPD_C8.2 J2.20
N$30: EPD_C11.2 J2.23
N$31: EPD_C12.2 J2.24
N$36: J3.B5 R2_USB.1
N$38: J3.A5 R1_USB.2
OUT+: IC4.A3 TP_OP.TP
OUT-: IC4.C3 TP_ON.TP
P0.00/XL1: C17.2 U$1.P$D2 X2.2
P0.01/XL2: C17.1 C18.1 C18.2 U$1.P$F2 X2.1
P0.04: U$1.P$J1
P0.09: U$1.P$L24
P0.13: C30.1 R1.1 SW1.2 U$1.P$AD8
P0.14: C31.1 R5.1 SW2.2 U$1.P$AC9
P0.19: U$1.P$AC15
P0.20: U$1.P$AD16
P0.21: U$1.P$AC17
P0.22: U$1.P$AD18
P0.23: U$1.P$AC19
P0.24: U$1.P$AD20
P0.25: U$1.P$AC21
P0.26: U$1.P$G1
P0.27: U$1.P$H2
P0.28: U$1.P$B11
P0.29: U$1.P$A10
P0.30: U$1.P$B9
P0.31: U$1.P$A8
P1.01: Q1.1 R_PWR_EPD.1 U$1.P$Y23
P1.02: C29.1 R6.1 SW3.2 U$1.P$W24
P1.03: U$1.P$V23
P1.04: U$1.P$U24
P1.05: U$1.P$T23
P1.06: U$1.P$R24
P1.07: U$1.P$P23
P1.09: U$1.P$R1
P1.10: U$1.P$A20
P1.11: U$1.P$B19
P1.12: U$1.P$B17
P1.13: U$1.P$A16
P1.14: U$1.P$B15
P1.15: U$1.P$A14
PMIC_INT: IC1.A1 U$1.P$T2
PREVGH: D5.1 EPD_C9.2 J2.21
PREVGL: D2.2 EPD_C10.2 J2.22
RESE: J2.3 Q3.2 R1_EP_DR.2
RESET: J1.6 TP_RESET.TP U$1.P$AC13
RF: ANT1.1 C4.1 C22.1 L1.2
SCK: J2.13 U$1.P$A12
SCL: IC1.B1 IC3.12 IC4.C1 R4.2 R17.2 TP_SCL.TP U1.7 U$1.P$M2
SDA: IC1.C1 IC3.2 IC4.B2 R2.2 R18.2 TP_SDA.TP U1.8 U$1.P$L1
SWDCLK: J1.4 TP_SWDCLK.TP U$1.P$AC24
SWDIO: J1.2 TP_SWDIO.TP U$1.P$AA24
SWO: TP_SW0.TP U$1.P$AD22
VBAT: C27.1 C37.1 IC1.C2 TP_VBAT.TP U1.2 U1.3
VBUS: C21.1 C38.1 C42.1 C43.1 D1.5 IC1.A2 J3.A4_B9 J3.A9_B4 U$1.P$AD2
VREG: C23.2 C24.2 C39.1 IC1.B2 IC2.A1 IC2.A2 IC2.A3 TP2.TP

## Tracks (layer width: path | path; a pad name or v marks a point on that pad's centre or on a via)
3V3  (via drill 0.3, 0.35)
  Top 0.3: U$1.P$B1 v40.03,18.5 | v40.03,18.5 40.63,18.5 C14.1 | 40.09,18.44 v40.03,18.5 | C12.1 40.54,13.37 40.34,13.17 v39.98,13.17 39.87,13.05 39.29,13.05 U$1.P$A22 | Q1.3 29.01,6 Q1.2 26.57,5.46 v26.57,5.39 | Q1.3 29.38,5.22 R_PWR_EPD.2 31.47,5.22 31.87,5.62 31.87,6.21 32.41,6.75 R5.2 | Q1.3 28.59,4.43 28.59,3.72 C6.1 | C34.1 2.99,26.74 C25.1 4.29,26.63 C33.1 v5.34,26.65 5.35,26.64 | v6.8,26.15 7.42,26.77 IC2.E2 IC2.E3 8.74,27.11 v8.75,27.1 | v17.4,26.53 17.92,26.53 IC4.C2 | U$1.P$AD23 32.16,12.5 32.2,12.54 31.12,12.54 | 31.12,12.54 30.79,12.54 30.79,13.7 31.45,14.36 31.48,14.36 | C19.1 v29.49,19.35 v29.48,19.34 | v30.57,20.89 30.74,21.06 IC3.7 31.28,21.01 31.28,20.54 32.59,20.54 32.97,20.92 | v31.33,23.3 31.58,23.3 31.83,23.05 IC3.3 | v36.55,31 36.87,30.69 J1.1 | v21.85,5.68 21.78,5.61 21.71,5.61 21.58,5.48 21.58,5.02 R1.2 18.8,4.89 | 18.8,4.89 17.19,4.89 15.81,6.27 11.36,6.27 10.91,6.72 10.44,6.72 R6.2 10.4,6.71 v10.4,7.29 | U$1.P$W1 33.99,18.74 32.72,18.74 C7.1 | U$1.P$W1 33.99,18.25 U$1.P$Y2 | 31.48,14.36 32.11,15 U$1.P$AD14 | v22.14,32.31 19.43,32.31 16.94,29.82 v16.94,29.71 | U$1.P$W1 34.33,18.59 v34.33,19.18 | v33.59,20.89 33,20.89 32.97,20.92 | 32.97,20.92 IC3.10 | R17.1 10.61,33.59 10.84,33.82 | 10.84,33.82 v10.87,33.84 | R18.1 11.15,33.5 10.84,33.82 | TP_3.3V.TP 17.79,1.56 17.79,3.89 18.8,4.89 | TP_3V3.TP 8.6,4.01 v8.6,5.32 v8.6,5.33 | v31.98,14.14 31.76,14.36 31.48,14.36 | C8.1 31.11,12.53 31.12,12.54
  Route15 0.3: v5.34,26.65 6.3,26.65 v6.8,26.15 | v29.48,19.34 30.57,20.43 v30.57,20.89 31.33,21.65 v31.33,23.3 31.33,26.25 | 31.33,26.25 32.03,26.95 32.06,26.95 32.13,27.02 32.13,32.3 33.43,33.6 36.29,33.6 36.55,33.34 v36.55,31 | v21.85,5.68 22.18,5.35 26.53,5.35 v26.57,5.39 32.21,5.39 v39.98,13.17 40.89,14.07 40.89,17.63 v40.03,18.5 39.54,18.99 35.87,18.99 35.67,19.18 | 31.33,26.25 30.92,26.25 28.42,28.75 28.42,31.94 28.01,32.35 22.14,32.35 v22.14,32.31 | v16.94,29.71 17.4,29.25 v17.4,26.53 16.24,26.53 15.67,27.1 v8.75,27.1 9.35,27.7 9.35,32.32 v10.87,33.84 | 35.67,19.18 v34.33,19.18 33.4,18.25 32.2,18.25 31.97,18.02 31.97,16.98 32.32,16.63 32.32,14.48 v31.98,14.14 | 35.67,19.18 35.63,19.22 35.63,21.64 35.11,22.16 34.72,22.16 33.59,21.03 v33.59,20.89 | v8.6,5.33 10.4,7.14 v10.4,7.29
ALERT
  Top 0.152: U1.5 44.09,30.73 45.47,29.35 45.47,23.58 45.64,23.41 45.64,10.94 45.05,10.36 44.01,10.36 43.54,9.89 43.54,9.5 43.16,9.11 41.08,9.11 40.04,8.07 38.79,8.07 38.6,7.89 36.69,7.89 36.26,8.32 36.26,11.52 U$1.P$J24
D+
  Top 0.152: 25.4,11.34 D1.4 26.57,12.69 26.74,12.69 27.75,13.7 29,13.7 29.47,14.17 29.47,15.42 31.05,17 U$1.P$AD6
D-
  Top 0.152: U$1.P$AD4 31.14,17.5 29.1,15.45 29.1,14.24 28.87,14.01 27.65,14.01 26.92,13.27 23.83,13.27 23.32,12.77 D1.6
DEC1
  Top 0.152: C5.1 38.95,19.21 U$1.P$C1
DEC3
  Top 0.152: C11.1 38.33,11.8 38.33,12.15 U$1.P$D23
DEC4_6  (via drill 0.2)
  Top 0.152: C10.1 37.74,10.95 U$1.P$E24 | U$1.P$B5 39.19,17.7 42,17.7 | 42,17.7 44.58,17.7 44.79,17.9 C15.1 44.79,19.6 C16.1 44.83,19.8 45.24,20.21 45.24,23.3 44.77,23.77 L3.2 | 42,17.7 42,17.04 41.59,16.64 40.66,16.64 40.32,16.3 v40.09,16.3
  Bottom 0.152: v40.09,16.3 40.69,15.7 40.69,14.96 U$1.P$E24
  other vias: 37.74,12
DN  (via drill 0.3)
  Top 0.152: D1.1 22.72,9.44 v22.72,15.33 | J3.A7 22.78,29.05 | J3.A7 v22.76,27.77 v22.77,27.76 | v22.75,26.32 22.75,24.98 23.28,24.46 23.28,22.26 22.67,21.65 22.67,17.93 v22.49,17.74 | J3.A7 22.76,29.87 23.07,30.18 v23.18,30.18 | v24.64,30.37 24.12,29.85 23.99,29.85 23.76,29.62 J3.B7
  Bottom 0.152: v22.77,27.76 22.77,26.33 v22.75,26.32 | v22.49,17.74 22.09,17.35 22.09,15.96 v22.72,15.33 | v23.18,30.18 23.36,30.37 v24.64,30.37
DP  (via drill 0.3)
  Top 0.152: D1.3 25.22,7.45 v25.07,7.3 | v24.27,24.98 24.56,24.69 24.56,23.87 24.81,23.62 24.81,21 25.67,20.14 25.67,17.34 26.26,16.75 26.26,14.73 25.46,13.94 v24.51,13.94 | v23.62,27.36 23.62,27.94 23.19,28.37 23.19,28.99 J3.A6 23.2,29.12 23.2,29.56 23.78,30.14 23.78,30.56 23.64,30.7 22.82,30.7 22.26,30.13 J3.B6
  Bottom 0.152: v25.07,7.3 25.07,13.38 v24.51,13.94 | v24.27,24.98 24.75,25.46 24.75,26.22 v23.62,27.36
EPD_3V3  (via drill 0.3)
  Top 0.3: v12.7,16.39 12.45,16.64 12.06,16.64 11.76,16.34 J2.15 J2.16 | v11.91,19.95 12.97,19.95 EPD_C5.2 | v24.82,20.09 24.77,20.03 C1-EP-DR.1 23.56,18.33 L5.1
  Route15 0.3: v12.7,16.39 11.91,17.18 v11.91,19.95 24.68,19.95 v24.82,20.09
EPD_BUSY  (via drill 0.3)
  Top 0.152: J2.9 11.45,19.34 14.12,16.67 20.04,16.67 20.55,17.19 23.46,17.19 24.01,16.64 24.01,15.39 v23.71,15.1 | U$1.P$AD12 32.71,15.47 30.68,15.47 v30.42,15.21
  Bottom 0.152: v30.42,15.21 29.9,14.7 24.12,14.7 v23.71,15.1
EPD_CS  (via drill 0.2, 0.3)
  Top 0.152: v9.31,18.88 9.31,18.63 10.1,17.84 J2.12
  Bottom 0.152: U$1.P$K2 36.49,17.75 36.39,17.66 34.11,17.66 34.08,17.68 30.51,17.68 30.48,17.65 29.2,17.65 29.1,17.75 24.38,17.75 22.82,19.31 19.5,19.31 18.1,17.91 10.28,17.91 v9.31,18.88
  other vias: 36.49,18
EPD_DC  (via drill 0.3)
  Top 0.152: J2.11 11.55,18.34 13.94,15.96 22.93,15.96 23.47,16.5 v23.49,16.5 | v31.46,16.23 32.5,16.23 U$1.P$AD10
  Bottom 0.152: v31.46,16.23 31.33,16.09 23.89,16.09 v23.49,16.5
EPD_RST  (via drill 0.2, 0.3)
  Top 0.152: J2.10 10.97,18.84 11.06,18.75 11.61,18.75 14,16.36 22.36,16.36 v22.62,16.62
  Bottom 0.152: U$1.P$AC11 33.22,15.73 33.21,15.74 23.5,15.74 v22.62,16.62
  other vias: 33.24,15.75
GDR  (via drill 0.3)
  Top 0.152: v14.69,22.78 14.69,22.81 15.73,22.81 16.59,23.66 R2_EP_DR.2 19.48,23.66 19.73,23.91 22.03,23.91 Q3.1 | v11.37,22.93 11.28,22.84 J2.2
  Bottom 0.152: v14.69,22.78 11.5,22.78 v11.36,22.92 | v11.36,22.92 | v11.36,22.92 v11.37,22.93
GND  (via drill 0.3, 0.35)  (41 unrouted)
  Top 0.15: IC2.C3 IC2.C2 IC2.C1 | J3.SH3 26.76,29.06 J3.A1_B12 26.21,28.56 25.9,28.24 25.62,28.24 25.44,28.06 25.44,27.23 25.33,27.13 24.64,27.13 R1_USB.1 | U1.9 42.68,29.93 42.97,30.22 42.97,30.69 U1.6 | U$1.P$F23 37.49,13.15 U$1.P$78 | TP_BAT_GND.TP 44.08,5.07 42.66,5.07 C22.2 42.11,5.07 C4.2 | TP_GND.TP 6.9,7.93 EPD_C11.1 EPD_C12.1 8.53,7.53 9.39,8.39 11.38,8.39 v12.18,7.58 v12.19,7.59 | v14.11,5.41 13.39,5.41 13.17,5.19 | EPD_C9.1 14.33,11.35 EPD_C10.1 | U1.1 41.48,28.76 v40.81,29.43 | v40.58,31.29 40.2,31.67 40.2,33.36 39.61,33.94 33.41,33.94 32.62,33.16 32.62,32.25 33.58,31.29 33.58,31.21 34.33,30.46 J1.5 | U$1.P$84 U$1.P$83 | U$1.P$74 U$1.P$84 | U$1.P$84 U$1.P$88 | U$1.P$74 34.79,15.25 U$1.P$89 | U$1.P$74 U$1.P$85 U$1.P$86 | U$1.P$74 U$1.P$78 | U$1.P$74 U$1.P$75 38.09,16.75 U$1.P$B7 39.16,17.17 v40.11,17.17 | C8.2 31.94,12.12 32.81,12.12 34.14,13.45 U$1.P$90 | C12.2 39.69,13.74 39.14,13.74 38.8,13.41 37.83,13.41 | 37.83,13.41 U$1.P$78 | 37.19,15.25 U$1.P$76 U$1.P$80 U$1.P$74 | U$1.P$74 37.19,15.25 | 37.19,15.25 U$1.P$77 | U$1.P$74 37.13,15.25 38.29,14.09 38.29,13.87 37.83,13.41 | C5.2 39.96,19.93 v39.96,20.24 40.06,20.34 C14.2 | C20.2 28.06,16.11 28.06,15.52 27.86,15.31 v27.28,15.31 | v25.73,15.26 25.76,15.26 25.79,15.24 25.35,15.24 C1-EP-DR.2 | IC4.B3 18.53,25.82 19.79,24.56 21.58,24.56 21.86,24.84 21.86,26.1 v21.71,26.25 | v21.74,27.57 21.42,27.25 R2_USB.2 20.7,27.25 20.1,27.85 19.12,27.85 18.53,27.26 IC4.B1 | C38.2 23.94,22.91 v23.94,24.07
  Top 0.152: J1.5 J1.3 | C29.2 12.94,5.42 13.17,5.19 13.44,4.92 | 13.44,4.92 13.44,4.09 SW3.1 | 13.44,4.92 15.51,2.85 v16.55,2.85 | v18.5,2.79 18.89,2.4 C30.2 | C6.2 26.62,3.19 25.89,3.92 SW1.1 24.7,3.92 v25.45,4.68 | D4.1 22.13,7.34 | 22.13,7.34 23.7,7.34 | 23.7,7.34 24.27,7.91 D1.2 | 23.7,7.34 23.85,7.19 v23.85,6.04 | IC4.B1 18.53,29.48 J3.SH4 | R2_EP_DR.1 18.45,22.88 R_TYPE_SEL.1 17.6,23.14 17.39,23.36 16.85,23.36 16.4,22.91 16.4,21.74 SJ1.1 14.89,20.22 EPD_C6.1 13.72,21.01 EPD_C5.1 12.1,21.01 10.93,19.84 J2.8 9.01,19.84 7.64,18.47 7.64,17.18 | 7.64,17.18 9.47,15.34 J2.17 12.52,15.34 EPD_C7.1 | 7.64,17.18 7.64,11.4 J2.MP2 | C1.2 42.41,9.7 42.15,9.45 39.74,9.45 C11.2 38.54,9.27 C10.2 37.25,9.06 v36.76,8.57 | IC3.9 IC3.8 32.06,21.29 v32.06,22.07 | C7.2 31.63,18.67 31.92,18.38 32.99,18.38 33.12,18.25 33.12,17.78 33.23,17.67 33.56,17.67 U$1.P$87 | C34.2 1.81,25.33 C25.2 3.12,25.35 C33.2 4.35,25.39 v5.42,25.39 | v8.59,27.95 8.56,27.91 IC2.C3 | X1.4 41.98,12.59 43.13,11.43 X1.2 | v34.63,22.82 34.99,22.46 34.99,22 34.75,21.75 R3.2 | C9.2 35.54,8.77 35.54,7.94 35.62,7.87 v35.63,7.87 | C37.2 28.57,26.69 v29.46,26.69 | v28.38,22.95 27.85,22.42 IC1.D2 | R9.1 26.6,19.82 26.63,19.79 27.4,19.79 v27.7,20.09 | C1-EP-DR.2 24.77,15.24 23.42,13.89 v23.42,13.82 | v21.12,7.32 21.14,7.34 22.13,7.34 | C16.2 43.86,20.37 41.21,20.37 C14.2 | C3.2 37.27,4.4 36.66,4.4 v36.65,4.41 | v42.69,6.36 42.69,5.1 42.66,5.07
  Route15 0.15: v21.71,26.25 21.71,27.54 v21.74,27.57 | v21.74,27.57
  Bottom 0.15: v12.19,7.59 12.19,6.17 12.58,5.78 13.76,5.78 14.11,5.43 v14.11,5.41 | v40.81,29.43 40.58,29.66 v40.58,31.29 | v40.11,17.17 40.83,17.88 40.83,19.37 v39.96,20.24 | v27.28,15.31 25.78,15.31 v25.73,15.26 | v23.94,24.07 23.94,24.49 23.69,24.73 23.69,24.99 23.83,25.13 23.83,25.44 23.42,25.85 22.1,25.85 v21.7,26.25 v21.71,26.25
  Bottom 0.152: v16.55,2.85 18.44,2.85 v18.5,2.79 19.97,2.79 23.23,6.04 v23.85,6.04 25.15,4.73 25.43,4.73 25.45,4.71 v25.45,4.68 | v5.42,25.39 7.4,25.39 8.28,26.27 8.28,27.78 8.4,27.9 8.55,27.9 v8.59,27.94 v8.59,27.95 | v32.06,22.07 32.77,22.07 34.04,23.34 34.28,23.34 34.71,22.91 34.71,22.89 v34.63,22.82 | v35.63,7.87 36.34,8.57 v36.76,8.57 | v29.46,26.69 29.81,26.33 29.81,23.83 | 29.81,23.83 29.63,23.64 29,23.64 28.38,23.02 v28.38,22.95 | v27.7,20.09 28.43,20.82 28.82,20.82 29.09,21.08 29.09,21.77 30.57,23.24 30.57,23.34 30.37,23.53 30.11,23.53 29.81,23.83 | v23.42,13.82 23.42,10.23 21.12,7.93 v21.12,7.32 | v36.65,4.41 40.74,4.41 v42.69,6.36
  pour Route2: 0.09,-1.33 46.93,-1.33 46.93,37.51 1.54,37.51 0.09,36.06
  pour Top: 0.03,35.21 0.02,35.18 -0.34,34.82 -0.34,-1.01 -0.33,-1 46.84,-1 46.84,34.67 46.85,34.7 47.53,35.38 0.05,35.38 0.04,35.38 0.03,35.38
  pour Bottom: 47.14,37.03 46.9,36.79 46.87,36.78 0.33,36.78 -0.11,36.34 -0.11,-1.48 46.22,-1.48 47.14,-0.56
HAPTIC_EN  (via drill 0.3)
  Top 0.152: v33.02,19.32 33.06,19.32 33.33,19.6 33.33,19.61 34.65,19.61 34.81,19.77 35.01,19.77 35.44,19.35 35.44,18.99 35.26,18.81 35.05,18.81 U$1.P$U1 | v19.83,27.31 19.2,27.31 IC4.A1
  Bottom 0.152: v33.02,19.32 32.44,18.74 27.96,18.74 27.29,18.07 24.59,18.07 20.52,22.15 20.52,26.63 v19.83,27.31
IMU_INT1  (via drill 0.3)
  Top 0.152: U$1.P$N1 35.74,19.57 35.1,20.21 v34.42,20.21 | v30.53,21.95 30.67,22.08 IC3.5
  Route15 0.152: 30.53,21.84 v30.53,21.95
  Bottom 0.152: v30.53,21.95 30.96,21.52 33.94,21.52 34.42,21.04 v34.42,20.21
IMU_INT2  (via drill 0.2, 0.3)
  Top 0.152: IC3.6 31.17,21.45 30.36,21.45 29.81,20.9 v29.52,20.9
  Bottom 0.152: v29.52,20.9 30.48,19.94 33.94,19.94 34.16,19.72 34.63,19.72 34.74,19.83 35.13,19.83 35.97,18.99 35.97,18.77 35.5,18.29 35.5,17.95 35.49,17.96 U$1.P$P2
  other vias: 35.49,18
LX1  (via drill 0.2)
  Top 0.152: L7.1 4.48,29.44 v4.48,29.09 | IC2.B3 IC2.B2
  Bottom 0.152: v4.48,29.09 5.28,28.3 7.4,28.3 IC2.B2
  other vias: 7.42,28.31
LX2  (via drill 0.2, 0.3)
  Top 0.15: IC2.D2 IC2.D3
  Top 0.152: L7.2 4.23,28.81 4.69,28.36 v4.69,28.23
  Bottom 0.152: v4.69,28.23 5.38,27.54 7.37,27.54 7.39,27.51 IC2.D2 7.4,27.51
  other vias: 7.42,27.51
MOSI  (via drill 0.3)
  Top 0.152: J2.14 8.9,16.84 v8.84,16.77 | v43.79,15.55 43.66,15.42 41.64,15.42 41.25,15.03 v40.05,15.03
  Route2 0.152: v40.05,15.03 39.97,14.95
  Bottom 0.152: v8.84,16.77 8.25,17.36 8.25,23 16.71,31.46 30.03,31.46 32.98,34.41 40.67,34.41 45.17,29.92 45.17,15.75 44.97,15.55 v43.79,15.55 | v40.05,15.03 39.28,15.03 39.07,14.82 38.87,14.82 38.74,14.96 U$1.P$B13
  other vias: 38.74,15.25
N$1
  Top 0.152: R3.1 34.1,22.61 IC3.1
N$2
  Top 0.152: R4.1 10.38,29.95 6.2,29.95 5.31,29.05 5.31,28.64 6.44,27.51 IC2.D1
N$3
  Top 0.152: R9.2 27.64,20.82 27.64,21.93 IC1.D1
N$5
  Top 0.152: IC2.E1 6.97,27.07 6.8,27.07 6.05,26.32 6.05,25.92 6.39,25.59 8.26,25.59 11.25,28.57 R2.1
N$6  (via drill 0.2, 0.3)
  Top 0.152: v30.08,17.15 29.94,17.29 28.18,17.29 C20.1
  Bottom 0.152: v30.08,17.15 33.16,17.15 33.26,17.26 U$1.P$AC5
  other vias: 33.24,17.25
N$7
  Top 0.152: C9.1 34.92,11.18 U$1.P$N24
N$8  (via drill 0.3)
  Top 0.152: U$1.P$H23 37.34,12.14 v37.34,9.6 | v36.68,6.83 36.66,6.86 | 36.66,6.86 | 36.66,6.86 37.22,6.86 C3.1 38,6.44 L1.1
  Bottom 0.152: v37.34,9.6 37.34,7.77 36.68,7.12 v36.68,6.83
N$9
  Top 0.152: U$1.P$A18 39.77,14.53 C13.1
N$10  (via drill 0.3)
  Top 0.152: Q3.3 22.17,19.74 L5.2 19.74,19.07 D5.2 19.7,18.13 v19.79,18.04 | v19.95,15.45 19.95,13.84 C2-EP-DR.2
  Bottom 0.152: v19.79,18.04 19.79,15.61 v19.95,15.45
N$11
  Top 0.15: U$1.P$B3 39.01,18.02 41.71,18.02
  Top 0.152: L2.1 41.97,18.5 41.97,18.28 41.71,18.02
N$12
  Top 0.152: C2.1 44.46,12.75 43.37,12.75 X1.3 42.37,13.43 41.29,13.43 40.36,12.5 U$1.P$A23
N$13
  Top 0.152: U$1.P$B24 39.12,11.61 41.59,11.61 X1.1 41.11,10.78 C1.1
N$14
  Top 0.152: L3.1 42.38,22 L2.2
N$16
  Top 0.152: R_TYPE_SEL.2 17.1,22.87 SJ1.2 18.02,21.83 R1_EP_DR.1
N$17
  Top 0.152: C2-EP-DR.1 21.32,13.14 D4.2 D2.1
N$20
  Top 0.152: C32.1 25.71,26.81 19.2,26.81 IC4.A2
N$21
  Top 0.152: EPD_C2.2 12.32,23.95 12.32,23.02 11.14,21.84 J2.4
N$23
  Top 0.152: EPD_C1.2 13.48,23.29 11.53,21.34 J2.5
N$25  (via drill 0.3)
  Top 0.152: EPD_C6.2 14.37,18.79 v14.37,17.29 | v8.41,15.59 9.08,14.93 10.55,14.93 J2.18
  Bottom 0.152: v14.37,17.29 12.68,15.59 v8.41,15.59
N$26
  Top 0.152: J2.19 12.22,14.34 EPD_C7.2
N$28
  Top 0.152: J2.20 11.59,13.84 12.91,12.52 EPD_C8.2
N$30
  Top 0.152: EPD_C11.2 9.31,10.62 9.31,11.99 9.67,12.34 J2.23
N$31
  Top 0.152: J2.24 10.64,10.84 EPD_C12.2
N$36
  Top 0.152: R2_USB.1 20.95,28.01 21.31,28.37 21.31,29.01 J3.B5
N$38
  Top 0.152: R1_USB.2 J3.A5
OUT+  (via drill 0.3)
  Top 0.15: TP_OP.TP 14.92,29.71 v15.9,28.73 | v19.73,25.41 19.27,25.86 19.27,25.89 IC4.A3
  Bottom 0.15: v15.9,28.73 15.9,25.66 16.38,25.18 19.5,25.18 v19.73,25.41
OUT-  (via drill 0.3)
  Top 0.15: TP_ON.TP 15.38,24.89 v16.38,25.89 | v17.37,25.68 17.82,26.14 IC4.C3
  Bottom 0.15: v16.38,25.89 17.16,25.89 v17.37,25.68
P0.00/XL1
  Top 0.152: U$1.P$D2 37.99,18.31 37.79,18.5 37.79,18.73 38.47,19.41 38.47,20.38 39.02,20.93 39.32,20.93 39.47,21.07 39.47,22.48 39.2,22.74 X2.2 39.5,23.51 C17.2
P0.01/XL2  (via drill 0.2, 0.3)
  Top 0.152: X2.1 36.37,22.88 C18.1 36.43,21.05 37.61,21.05 | v37.61,19.63 37.61,21.05 | 37.61,21.05 C18.2 38.56,21.11 v38.96,21.51 | v40.05,21.55 40.7,22.21 C17.1
  Bottom 0.152: U$1.P$F2 37.49,19.53 37.6,19.64 v37.61,19.63 | v38.96,21.51 39.02,21.56 40.05,21.56 v40.05,21.55
  other vias: 37.49,18
P0.13
  Top 0.152: C30.1 19.97,3.92 SW1.2 22.01,4.32 R1.1 24.13,4.89 26.45,7.21 26.45,11.98 27.84,13.38 29.13,13.38 29.81,14.05 29.81,15.34 31.17,16.7 32.53,16.7 U$1.P$AD8
P0.14  (via drill 0.2, 0.3)
  Top 0.152: SW2.2 33.09,4.55 C31.1 33.09,5.96 R5.1 33.12,6.2 33.54,6.62 33.54,6.85 32.34,8.04 31.34,8.04 30.89,8.49 29.98,8.49 v29.7,8.21 | v29.3,16.73 29.3,16.08 28.77,15.55 28.77,14.62 28.45,14.31 27.53,14.31 27.53,14.3 27.2,13.97 v26.91,13.97
  Bottom 0.152: v29.7,8.21 29.6,8.3 29.6,13.51 29.14,13.97 v26.91,13.97 | U$1.P$AC9 32.39,16.25 31.85,16.78 30.56,16.78 30.26,16.48 29.3,16.48 v29.3,16.73
  other vias: 33.24,16.25
P1.01  (via drill 0.2, 0.3)
  Top 0.152: R_PWR_EPD.1 30.11,6.95 Q1.1 30.6,7.59 v31.53,7.59
  Bottom 0.152: v31.53,7.59 33.21,7.59 33.99,8.37 U$1.P$Y23
  other vias: 33.99,12.5
P1.02  (via drill 0.3)
  Top 0.152: SW3.2 10.61,5.23 C29.1 R6.1 9.97,6.15 9.79,6.33 9.79,7.6 10,7.81 10.82,7.81 11.81,6.82 v12.88,6.82 | U$1.P$W24 31.14,8.9 29.16,8.9 28.72,8.47 v28.72,8.23
  Bottom 0.152: v28.72,8.23 28.72,8.16 28.29,7.73 26.61,7.73 25.7,6.82 25.7,6.75 25.5,6.55 13.15,6.55 v12.88,6.82 | v12.88,6.82
PMIC_INT  (via drill 0.2, 0.3)
  Top 0.152: IC1.A1 25.74,22.02 25.52,21.8 25.52,20.9 25.96,20.45 25.96,18.62 26.38,18.2 29.67,18.2 29.75,18.12 v30.09,18.12
  Bottom 0.152: v30.09,18.12 30.23,17.98 34.97,17.98 U$1.P$T2
  other vias: 34.99,18
PREVGH  (via drill 0.3)
  Top 0.15: D5.1 16.2,17.77 v15.76,17.34 | v16.11,15.18 15.91,14.99 15.91,13.32 v15.93,13.31 | v9.76,13.25 9.86,13.34 J2.21
  Top 0.152: J2.21 11.05,13.34 EPD_C9.2
  Bottom 0.15: v15.76,17.34 16.11,16.99 v16.11,15.18 | v15.93,13.31 14.35,11.72 8.73,11.72 8.6,11.86 8.6,12.65 9.2,13.25 v9.76,13.25
PREVGL
  Top 0.152: J2.22 10.98,12.84 11.67,12.15 11.67,10.71 12.05,10.33 EPD_C10.2 14.48,8.89 D2.2
RESE  (via drill 0.3)
  Top 0.152: Q3.2 21.41,23.11 R1_EP_DR.2 20.13,22.13 19.67,22.59 19.41,22.59 v19.39,22.58 v19.39,22.59 | v9.7,22.25 9.79,22.34 J2.3
  Bottom 0.152: v19.39,22.59 18.63,21.84 14.58,21.84 13.88,21.14 9.68,21.14 9.42,21.4 9.42,21.57 9.7,21.85 v9.7,22.25
RESET  (via drill 0.3)
  Top 0.15: TP_RESET.TP 26.79,10.3 26.79,11.84 26.77,11.86 27.99,13.07 29.26,13.07 v30.3,14.11
  Top 0.152: J1.6 34.05,28.83 33.36,29.53 29.3,29.53 27.42,31.41 24.55,31.41 v21.63,34.33
  Bottom 0.15: v30.3,14.11 30.3,14.36 30.35,14.41 30.69,14.75
  Bottom 0.152: v21.63,34.33 21.39,34.33 19.27,32.21 14.1,32.21 11.95,34.36 6.35,34.36 5.03,33.05 3.63,33.05 1.37,30.79 1.37,25.67 2.18,24.87 7.84,24.87 8.03,24.68 8.03,24.12 7.59,23.68 7.59,14.66 7.84,14.41 30.35,14.41 | 30.69,14.75 31.44,14.75 31.93,15.25 U$1.P$AC13
  other vias: 33.24,15.25
RF
  Top 0.152: C22.1 41.84,4.48 C4.1 39.72,4.48 L1.2 39.62,3.51 ANT1.1
SCK  (via drill 0.3)
  Top 0.152: J2.13 9.39,17.34 v8.79,17.94 | v43.28,16.29 40.78,16.29 39.98,15.5 U$1.P$A12
  Bottom 0.152: v8.79,17.94 8.79,22.79 17.01,31.02 30.3,31.02 33.18,33.9 40.68,33.9 44.89,29.7 44.89,22.69 44.83,22.64 44.83,17.51 44.87,17.47 44.87,16.91 44.05,16.09 43.48,16.09 v43.28,16.29
SCL  (via drill 0.2, 0.3)
  Top 0.15: 9.79,32.74 R17.2 10.61,31.42 10.99,31.04 10.99,29.97
  Top 0.152: R4.2 10.99,29.97 12.14,29.97 14.18,27.94 17.22,27.94 IC4.C1 17.36,27.14 16.93,26.71 16.93,24.27 16.98,24.22 22.42,24.22 v22.6,24.4 | IC3.12 33.85,22.08 34.01,21.93 34.01,21.4 | 34.01,21.4 34.01,21.39 34.07,21.33 34.07,20.63 33.62,20.18 29.22,20.18 v28.17,21.23 | v34.84,21.25 34.69,21.4 34.01,21.4 | IC1.B1 26.94,21.93 26.25,21.25 v26.12,21.25 | v41.5,32.12 42.43,31.19 U1.7
  Top 0.3: 9.79,32.74 TP_SCL.TP
  Bottom 0.152: 36.33,19.09 34.84,20.57 v34.84,21.25 | 36.33,19.09 36.33,18.54 35.88,18.1 U$1.P$M2 | v28.17,21.23 27.73,20.79 26.39,20.79 | 26.39,20.79 26.12,21.05 v26.12,21.25 | v22.6,24.4 26.21,20.79 26.39,20.79 | 36.33,19.09 36.33,19.78 36.72,20.18 36.72,22.42 30.79,28.35 30.79,30.86 33.51,33.57 40.08,33.57 41.5,32.15 v41.5,32.12
  other vias: 35.99,18
SDA  (via drill 0.2, 0.3)
  Top 0.15: v11.93,30.77 11.93,31.89 11.15,32.66 R18.2
  Top 0.152: v16.65,27.35 13.16,27.35 11.99,28.52 R2.2 | U$1.P$L1 36.24,19.54 35.36,20.42 35.36,22.77 34.89,23.23 | 34.89,23.23 34.89,23.24 | 34.76,23.77 35.52,23.77 36.26,24.51 39.91,24.51 40.22,24.83 40.22,30.1 40.85,30.73 U1.8 | 34.76,23.77 33.16,23.77 | 33.16,23.77 33.17,23.77 30.26,23.77 v29.62,23.14 28.84,23.14 28.21,23.77 26.1,23.77 25.87,24.01 25.87,24.13 24.33,25.67 23.69,25.67 v23.3,25.27 | 33.16,23.77 32.33,22.93 IC3.2 | IC1.C1 27.34,21.7 27,21.37 v27,21.25 | v21.06,25.03 v19.83,26.27 v19.82,26.27 | 34.89,23.23 34.76,23.36 34.76,23.77
  Top 0.3: R18.2 12.02,32.76 12.51,33.24 TP_SDA.TP | v11.73,29.22 11.93,29.02 R2.2
  Bottom 0.152: 17.23,27.35 17.81,27.35 IC4.B2 19.45,26.64 v19.82,26.27 | 17.23,27.35 17.23,27.34 | 17.23,27.35 16.67,27.35 16.66,27.34 v16.65,27.35 | v27,21.25 28.18,22.43 28.91,22.43 v29.62,23.14 | v23.3,25.27 23.02,25 21.06,25 v21.06,25.03
  Bottom 0.3: v11.93,30.77 11.93,29.41 v11.73,29.22
  other vias: 18.53,26.64
SWDCLK  (via drill 0.3)
  Top 0.152: J1.4 36.46,27.96 36.46,27.92 v36.49,27.88 | v34.41,6.51 34.35,6.51 32.19,8.68 v31.81,8.68 | v30.67,10.71 | v30.67,10.71 31.12,11.16 32.25,11.16 33.09,12 U$1.P$AC24
  Top 0.3: TP_SWDCLK.TP 30.32,3.38 v31.17,4.23
  Bottom 0.152: v36.49,27.88 36.49,25.97 37.52,24.95 41.86,24.95 42.07,24.73 42.07,11.44 38.03,7.4 38.03,7.26 37.06,6.29 34.64,6.29 v34.41,6.51 | v31.81,8.68 30.67,9.82 v30.67,10.71
  Bottom 0.3: v31.17,4.23 31.17,6.85 30.23,7.79 30.23,8.45 30.46,8.68 v31.81,8.68
SWDIO  (via drill 0.3)
  Top 0.152: J1.2 37.4,28.83 37.71,28.52 39.04,28.52 v39.12,28.6 | v35.98,5.41 35.98,6.55 33.45,9.08 v33.32,9.08 | v31.94,10.48 32.35,10.89 32.64,10.89 33.74,11.98 U$1.P$AA24 | TP_SWDIO.TP 42.01,7.61 v39.6,7.61
  Bottom 0.152: v39.12,28.6 42.4,25.32 42.4,11.23 38.93,7.76 | 38.93,7.76 36.28,5.11 36.14,4.97 35.63,4.97 35.41,5.19 35.41,5.24 35.58,5.41 v35.98,5.41 | v33.32,9.08 31.94,10.46 v31.94,10.48 | v39.6,7.61 39.09,7.61 38.93,7.76
SWO  (via drill 0.3)
  Top 0.15: TP_SW0.TP 29.37,11.53 v30.13,12.29 | v32.01,13.23 32.25,13 U$1.P$AD22
  Bottom 0.15: v30.13,12.29 31.07,13.23 v32.01,13.23
VBAT  (via drill 0.3)
  Top 0.152: U1.3 42.93,26.98 C27.1
  Top 0.3: v41.49,27.65 41.77,27.65 42.43,28.31 U1.2 U1.3 | v31.16,27.06 28.96,24.87 | 28.96,24.87 C37.1 | IC1.C2 27.34,23 v27.5,23.16 | v29.25,24.12 29.25,24.58 28.96,24.87 | TP_VBAT.TP 29.31,32.99 29.31,30.58 v29.34,30.55
  Route15 0.3: v41.49,27.65 39.76,29.38 39.76,33.36 38.93,34.19 33.15,34.19 31.25,32.28 31.25,27.09 31.22,27.06 v31.16,27.06 | v27.5,23.16 28.45,24.12 v29.25,24.12
  Bottom 0.3: v29.34,30.55 29.79,30.09 29.79,28.17 30.89,27.06 v31.16,27.06
VBUS  (via drill 0.3)
  Top 0.152: C43.1 15.87,33.84 C42.1 | 25.21,29.27 J3.A4_B9
  Top 0.3: C42.1 17.04,32.68 v17.12,32.68 | v21.05,30.36 20.87,30.17 20.87,29.84 20.61,29.58 J3.A9_B4 | v24.83,27.61 24.83,28 25.23,28.39 25.23,28.88 J3.A4_B9 | IC1.A2 26.34,22.42 26.11,22.66 25.87,22.66 | 25.87,22.66 25.87,23.26 v25.07,24.06 | U$1.P$AD2 32.74,17.98 32.65,17.89 31.28,17.89 30.51,18.67 28.78,18.67 28.31,19.14 C21.1 28.64,19.54 28.64,19.99 v28.58,20.05 | 25.87,22.66 25.65,22.43 v25.39,22.43 | v23.21,21.22 23.93,21.22 C38.1 | D1.5 24.27,12.64 v24.3,12.67
  Route15 0.3: v17.12,32.68 17.84,31.96 20.62,31.96 21.18,31.4 21.18,30.46 21.07,30.35 | 21.07,30.35 v21.05,30.36 | v25.07,24.06 25.07,25.55 | 25.07,25.55 25.07,25.94 29.4,25.94 30.54,24.8 30.54,22.97 29.25,21.68 29.16,21.68 28.85,21.36 28.85,20.47 28.43,20.05 v28.58,20.05 28.58,16.51 29.75,15.35 29.75,15 29.41,14.66 26.65,14.66 24.66,12.67 v24.3,12.67 | 25.07,25.55 24.8,25.83 24.8,27.61 v24.83,27.61 22.1,30.35 21.07,30.35 | v25.39,22.43 25.31,22.35 23.41,22.35 22.96,21.9 22.96,21.47 v23.21,21.22
VREG  (via drill 0.3)
  Top 0.15: 4.07,32.33 C23.2
  Top 0.152: 26.73,24.64 C39.1
  Top 0.3: C23.2 6.85,32.33 C24.2 7.2,31.97 v8.44,31.97 | v7.55,29.42 7.55,28.85 IC2.A2 | v7.55,29.42 6.77,29.42 6.65,29.3 6.65,29.08 IC2.A1 | v7.55,29.42 7.55,28.84 7.68,28.71 IC2.A3 10.38,28.71 v10.51,28.59 | IC1.B2 26.94,22.83 26.61,23.15 v26.39,23.15 | v25.83,25.06 26.64,25.06 C39.1 | v10.87,26.45 10.87,27.04 11.52,27.68 v11.52,27.86 | TP2.TP 4.07,32.33
  Route15 0.3: v8.44,31.97 8.44,30.3 v7.55,29.42 | v25.83,25.06 26.39,24.5 v26.39,23.15 26.39,22.41 24.84,20.87 23.97,20.87 23.62,20.52 22.39,20.52 22.06,20.85 11.1,20.85 10.46,21.49 10.46,26.03 v10.87,26.45 | v11.52,27.86 11.23,27.86 v10.51,28.59
(copper drawn outside any net)
  shapes: Bottom area x1, Route2 area x1, Top area x1